# Altium PCB LED Dice.PcbDoc
Units mil, origin at the board's own origin, x right, y up, seen from the top; angles counter-clockwise.
Board outline 1950 x 950 mil, 4 copper layers (Layer 1, Layer 2, Layer 3, Layer 4), stack 22.373 mil thick; 66 components, 45 nets, 199 pads, 54 vias.
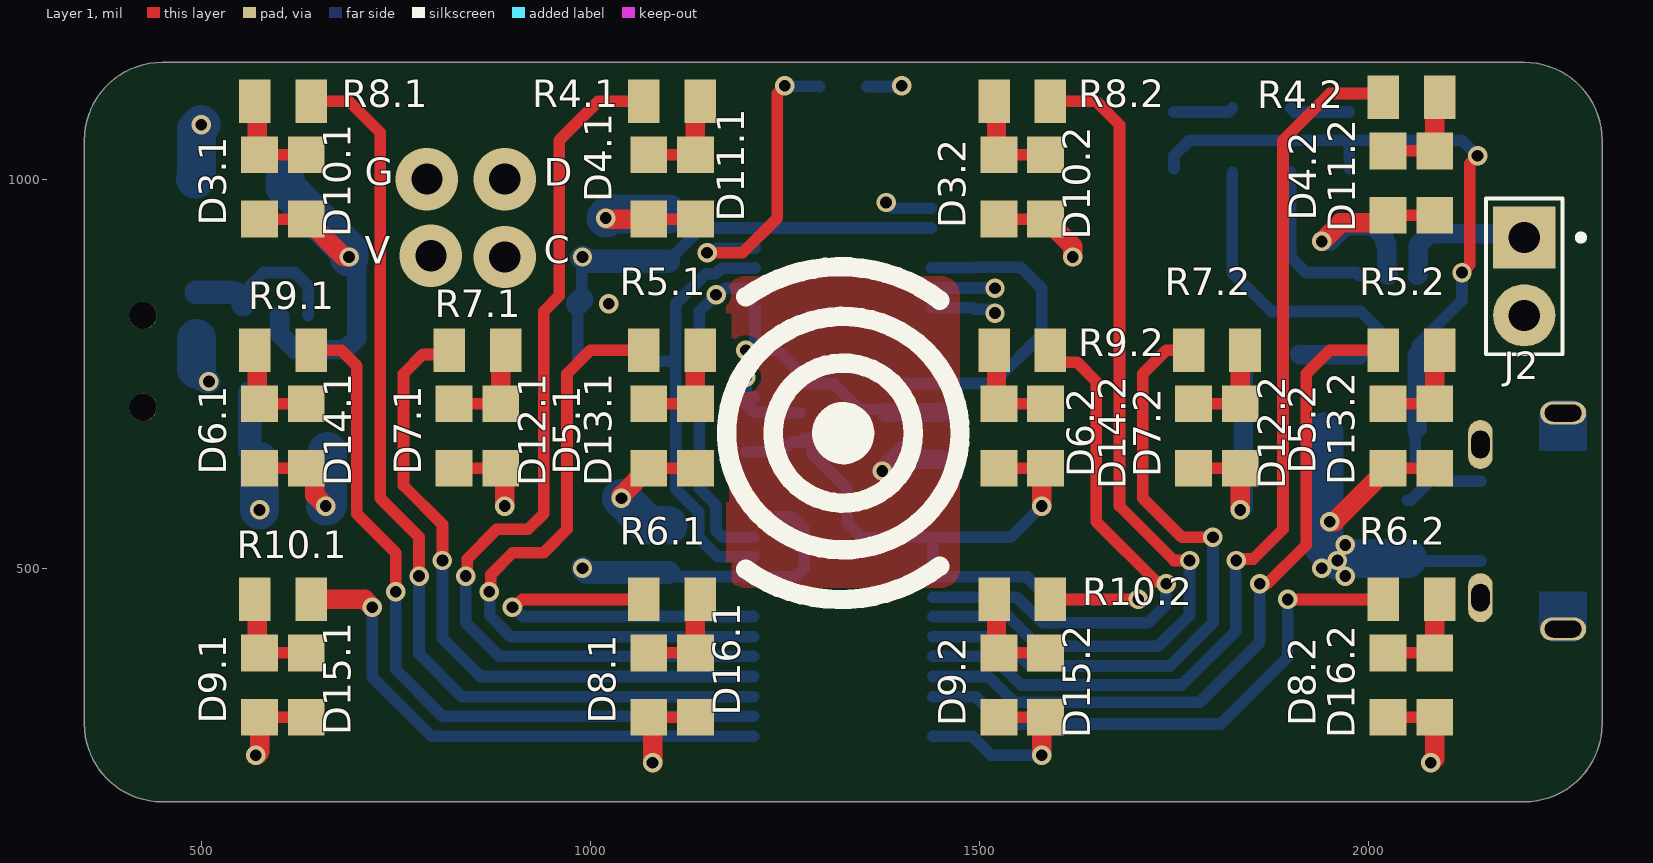
[diagram p0: Layer 1 view]
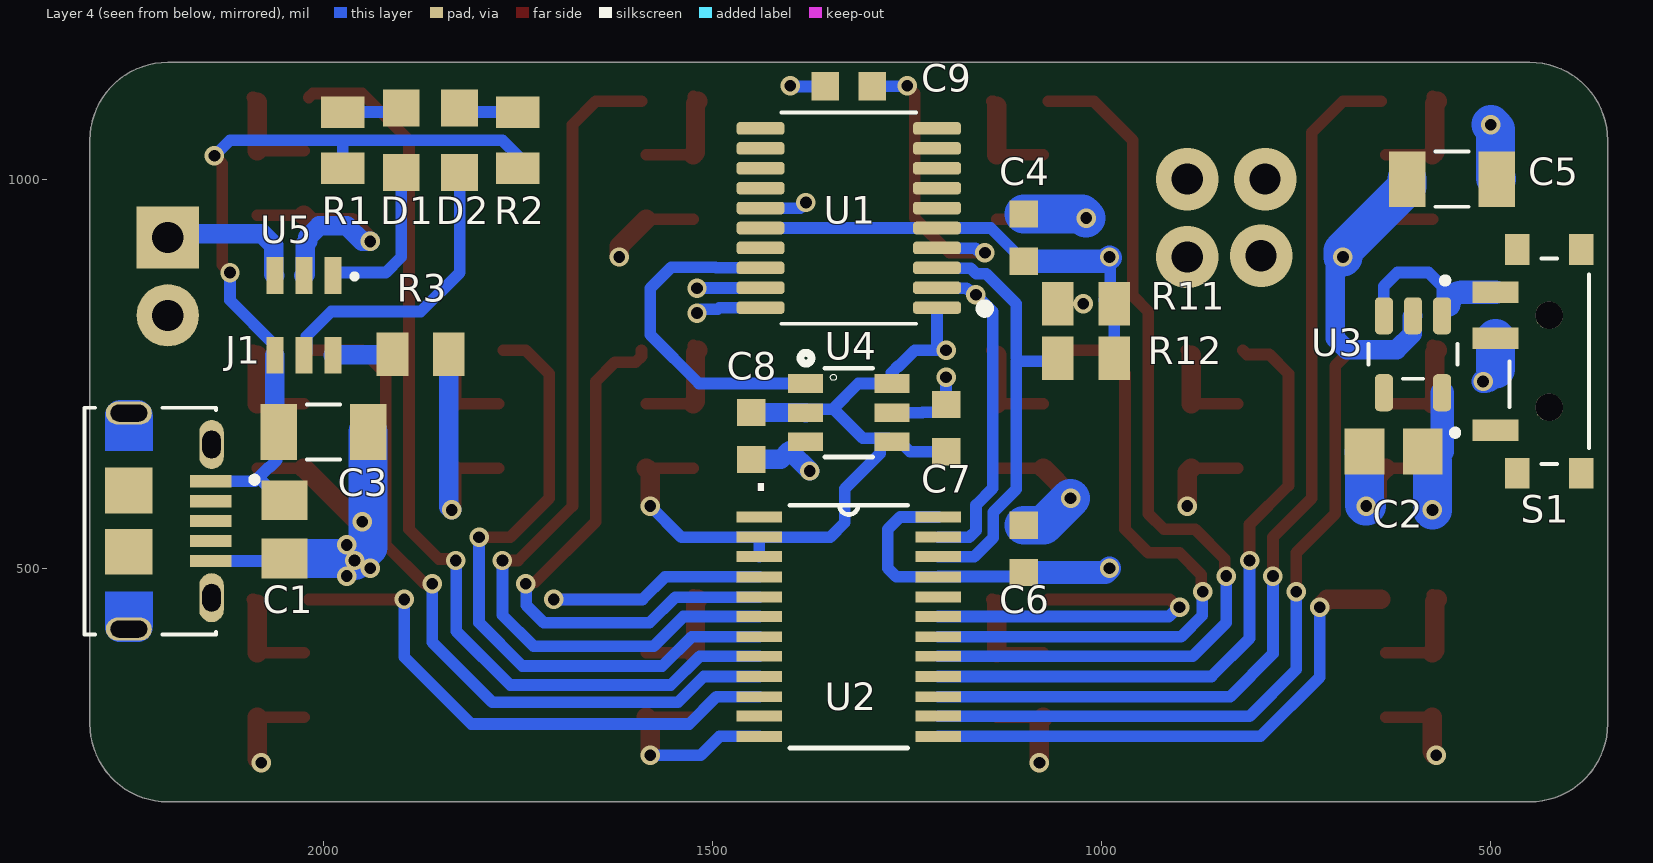
[diagram p1: Layer 4 view, seen from below]
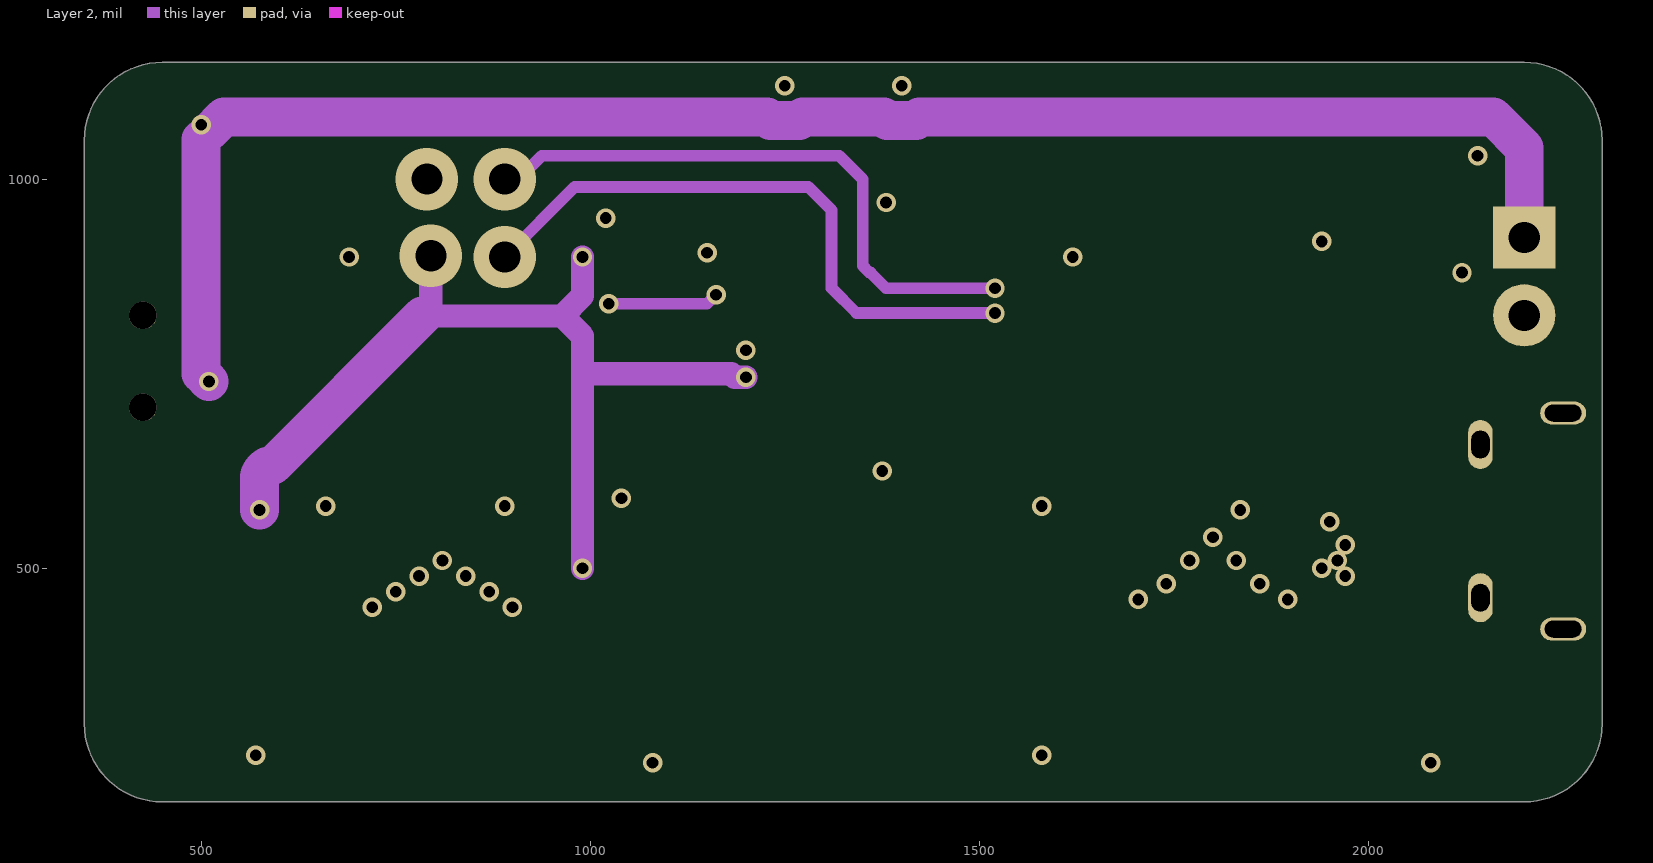
[diagram p2: Layer 2]
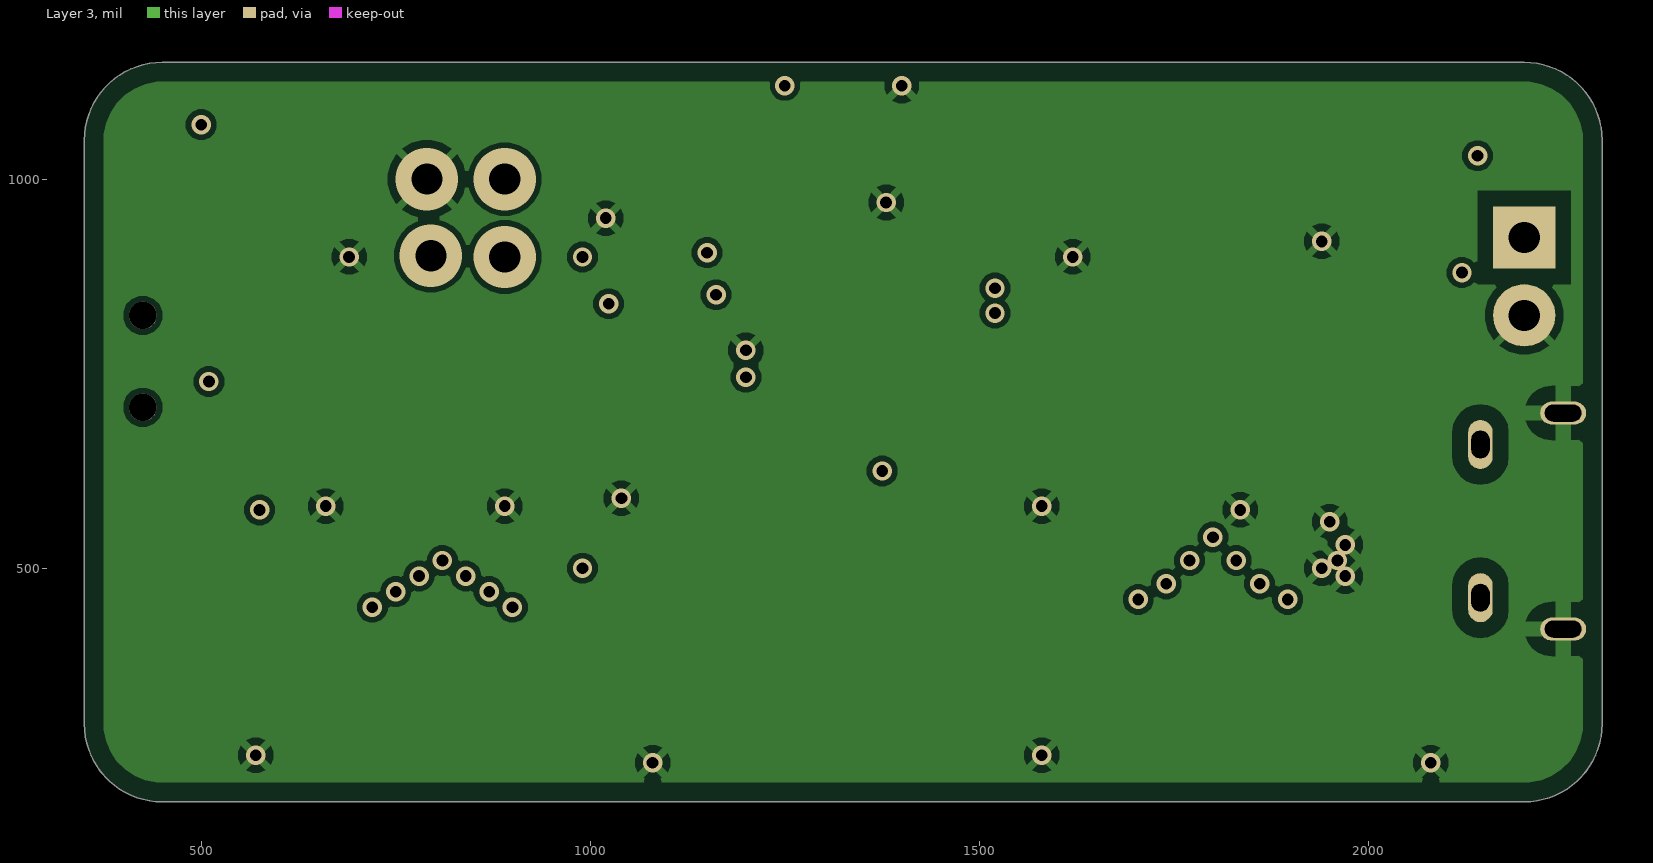
[diagram p3: Layer 3]
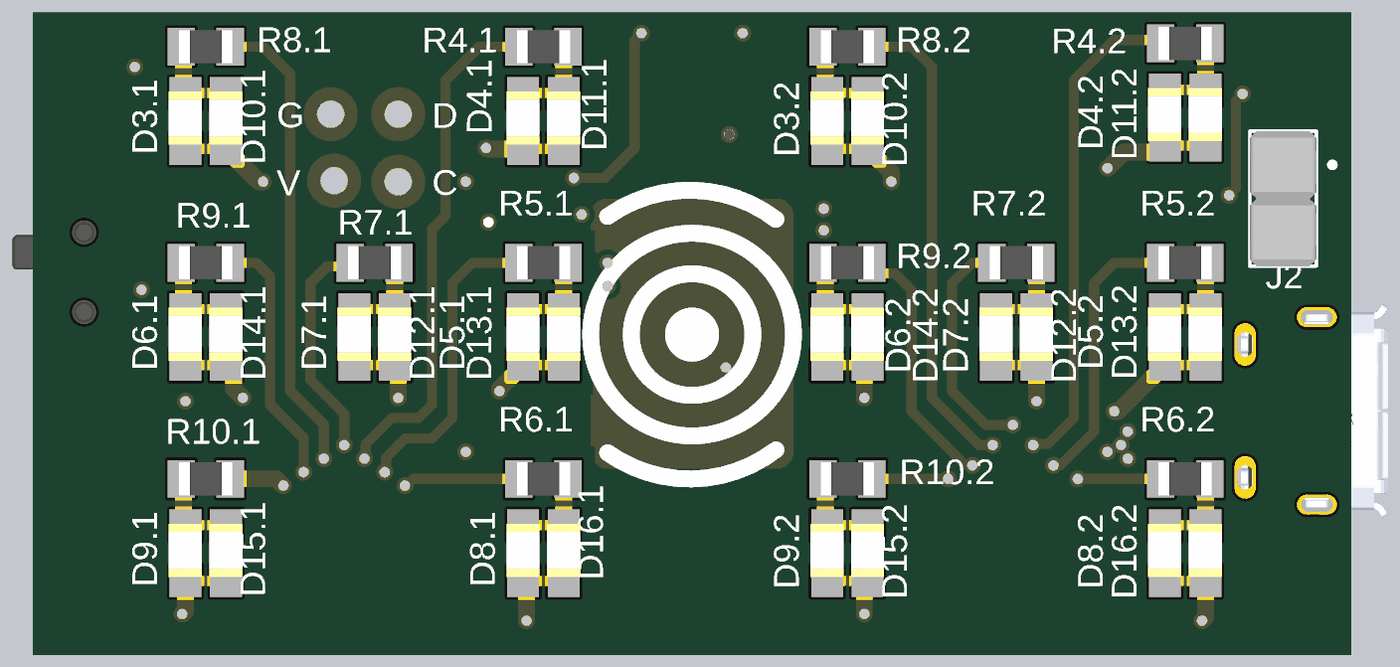
[diagram p4: 3D render of the assembled board from above, using the file's embedded part models]
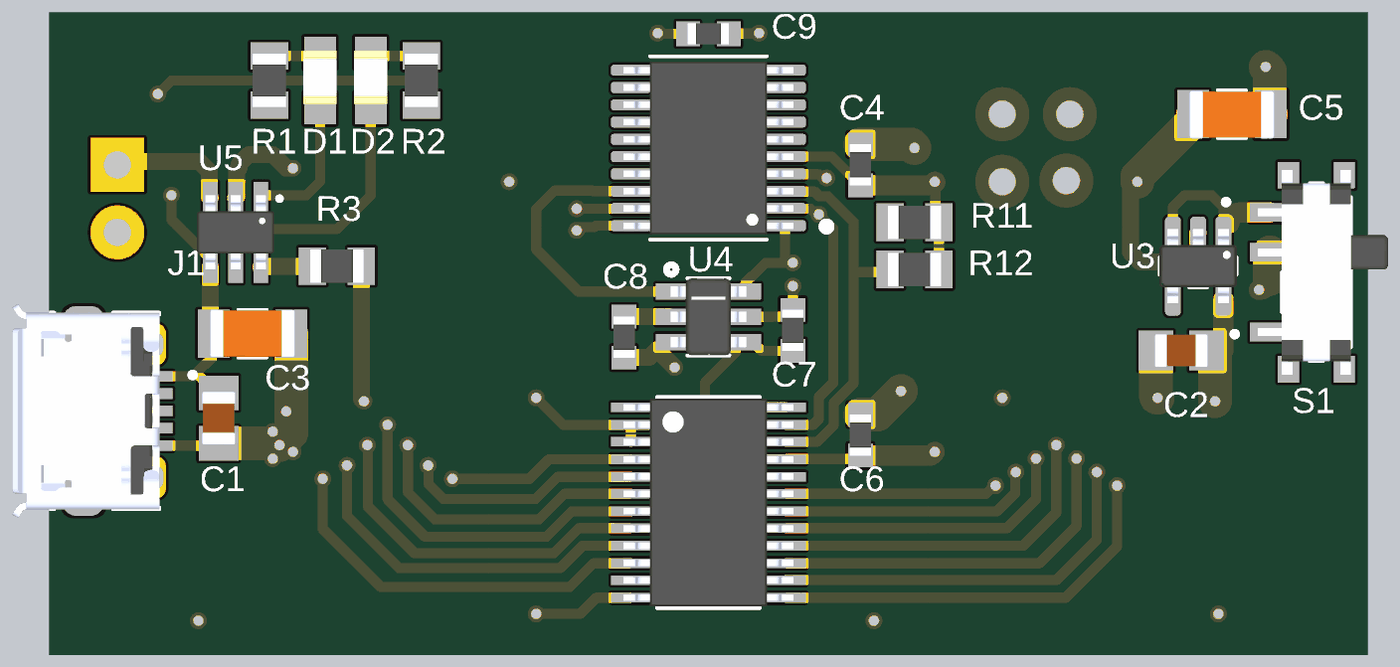
[diagram p5: 3D render of the assembled board from below, using the file's embedded part models]

## Layer stack, top to bottom
Top Solder: solder mask 0.4, Solder Resist, Dk 3.5
Layer 1: signal copper 1.378
Dielectric 2: prepreg 2.8, PP-006, Dk 4.1
Layer 2: signal copper 0.7087
Dielectric 1: dielectric 12.6, FR-4, Dk 4.8
Layer 3: signal copper 0.7087
Dielectric 3: prepreg 2.8, PP-006, Dk 4.1
Layer 4: signal copper 1.378
Bottom Solder: solder mask 0.4, Solder Resist, Dk 3.5

## Board outline
450,200 cw(c450,300) 350,300 350,1050 cw(c450,1050) 450,1150 2200,1150 cw(c2200,1050) 2300,1050 2300,300 cw(c2200,300) 2200,200

## Design rules (kind name [scope] priority, off if disabled: settings)
Clearance [All] p1: gap=7 ignorepadtopadclearanceinfootprint=FALSE except(20: SMDPad-Fill SMDPad-Poly SMDPad-Region THPad-Fill THPad-Poly THPad-Region)
PlaneClearance [All] p1: clearance=30
PolygonConnect [All] p1: connectstyle=Relief reliefconductorwidth=10 reliefentries=4 polygonreliefangle="45 Angle" airgapwidth=10
RoutingVias [All] p1: holewidth=15 width=25 viastyle="Through Hole" minholewidth=6 minwidth=10 maxholewidth=150 maxwidth=200
SolderMaskExpansion [All] p1: expansion=4 istentingtop=FALSE
Width [All] p1: maxlimit=300 minlimit=10 preferedwidth=25
29 further rules are at their usual default settings.

## Classes and differential pairs
channel class "LED Matrix": "LED Matrix1" "LED Matrix2"
component class "LED Matrix1": D3.2 D4.2 D5.2 D6.2 D7.2 D8.2 D9.2 D10.2 D11.2 D12.2 D13.2 D14.2 D15.2 D16.2 R4.2 R5.2 R6.2 R7.2 R8.2 R9.2 R10.2
component class "LED Matrix2": D3.1 D4.1 D5.1 D6.1 D7.1 D8.1 D9.1 D10.1 D11.1 D12.1 D13.1 D14.1 D15.1 D16.1 R4.1 R5.1 R6.1 R7.1 R8.1 R9.1 R10.1
component class "LED Dice": C1 C2 C3 C4 C5 C6 C7 C8 C9 D1 D2 J1 R1 R2 R3 R11 R12 S1 U1 U2 U3 U4 U5

## Components (designator, comment, footprint, x,y, rotation, side; value= is the part's Value field where it differs from the comment)
C1 "0805B105K500NT" CAPC2012X135N 2050,550 r270 bottom
C2 "0805B105K500NT" CAPC2012X135N 625,650 r0 bottom
C3 "CL31A106KPHNNNE" CAPC3216X180N 2000,675 r180 bottom
C4 "CL10B104KB8NNNC" CAPC1608X90N 1100,925 r270 bottom
C5 "CL31A106KPHNNNE" CAPC3216X180N 550,1000 r0 bottom
C6 "CL10B104KB8NNNC" CAPC1608X90N 1100,525 r270 bottom
C7 "CL10B104KB8NNNC" CAPC1608X90N 1200,680 r90 bottom
C8 "GRM0335C1E8R0CA01D" CAPC1608X90N 1450,670 r270 bottom
C9 "CL10B104KB8NNNC" CAPC1608X90N 1325,1119.09 r180 bottom
D1 "LTST-C171KRKT" DIOC200X125X110 1900,1050 r90 bottom
D2 "LTST-C171KRKT" DIOC200X125X110 1825,1050 r90 bottom
D3.1 "LTST-C171KRKT" DIOC200X125X110 575,990 r90 top (schematic designator D3)
D3.2 "LTST-C171KRKT" DIOC200X125X110 1525,990 r90 top (schematic designator D3)
D4.1 "LTST-C171KRKT" DIOC200X125X110 1075,990 r90 top (schematic designator D4)
D4.2 "LTST-C171KRKT" DIOC200X125X110 2025,995 r90 top (schematic designator D4)
D5.1 "LTST-C171KRKT" DIOC200X125X110 1075,670 r90 top (schematic designator D5)
D5.2 "LTST-C171KRKT" DIOC200X125X110 2025,670 r90 top (schematic designator D5)
D6.1 "LTST-C171KRKT" DIOC200X125X110 575,670 r90 top (schematic designator D6)
D6.2 "LTST-C171KRKT" DIOC200X125X110 1525,670 r90 top (schematic designator D6)
D7.1 "LTST-C171KRKT" DIOC200X125X110 825,670 r90 top (schematic designator D7)
D7.2 "LTST-C171KRKT" DIOC200X125X110 1775,670 r90 top (schematic designator D7)
D8.1 "LTST-C171KRKT" DIOC200X125X110 1075,350 r90 top (schematic designator D8)
D8.2 "LTST-C171KRKT" DIOC200X125X110 2025,350 r90 top (schematic designator D8)
D9.1 "LTST-C171KRKT" DIOC200X125X110 575,350 r90 top (schematic designator D9)
D9.2 "LTST-C171KRKT" DIOC200X125X110 1525,350 r90 top (schematic designator D9)
D10.1 "LTST-C171KRKT" DIOC200X125X110 635,990 r90 top (schematic designator D10)
D10.2 "LTST-C171KRKT" DIOC200X125X110 1585,990 r90 top (schematic designator D10)
D11.1 "LTST-C171KRKT" DIOC200X125X110 1135,990 r90 top (schematic designator D11)
D11.2 "LTST-C171KRKT" DIOC200X125X110 2085,995 r90 top (schematic designator D11)
D12.1 "LTST-C171KRKT" DIOC200X125X110 885,670 r90 top (schematic designator D12)
D12.2 "LTST-C171KRKT" DIOC200X125X110 1835,670 r90 top (schematic designator D12)
D13.1 "LTST-C171KRKT" DIOC200X125X110 1135,670 r90 top (schematic designator D13)
D13.2 "LTST-C171KRKT" DIOC200X125X110 2085,670 r90 top (schematic designator D13)
D14.1 "LTST-C171KRKT" DIOC200X125X110 635,670 r90 top (schematic designator D14)
D14.2 "LTST-C171KRKT" DIOC200X125X110 1585,670 r90 top (schematic designator D14)
D15.1 "LTST-C171KRKT" DIOC200X125X110 635,350 r90 top (schematic designator D15)
D15.2 "LTST-C171KRKT" DIOC200X125X110 1585,350 r90 top (schematic designator D15)
D16.1 "LTST-C171KRKT" DIOC200X125X110 1135,350 r90 top (schematic designator D16)
D16.2 "LTST-C171KRKT" DIOC200X125X110 2085,350 r90 top (schematic designator D16)
J1 "10118194-0001LF" AMPHENOL_10118194-0001LF 2250,560.63 r270 bottom
J2 "826646-2" TE_826646-2 2200,875 r270 top
R1 "0805W8F1001T5E" RESC2012X65N 1975,1050 r270 bottom
R2 "0805W8F1001T5E" RESC2012X65N 1750,1050 r270 bottom
R3 "0805W8F1002T5E" RESC2012X65N 1875,775 r0 bottom
R4.1 "0805W8F2200T5E" RESC2012X65N 1105,1100 r180 top (schematic designator R4)
R4.2 "0805W8F2200T5E" RESC2012X65N 2055,1105 r180 top (schematic designator R4)
R5.1 "0805W8F2200T5E" RESC2012X65N 1105,780 r180 top (schematic designator R5)
R5.2 "0805W8F2200T5E" RESC2012X65N 2055,780 r180 top (schematic designator R5)
R6.1 "0805W8F2200T5E" RESC2012X65N 1105,460 r180 top (schematic designator R6)
R6.2 "0805W8F2200T5E" RESC2012X65N 2055,460 r180 top (schematic designator R6)
R7.1 "0805W8F2200T5E" RESC2012X65N 855,780 r180 top (schematic designator R7)
R7.2 "0805W8F2200T5E" RESC2012X65N 1805,780 r180 top (schematic designator R7)
R8.1 "0805W8F2200T5E" RESC2012X65N 605,1100 r0 top (schematic designator R8)
R8.2 "0805W8F2200T5E" RESC2012X65N 1555,1100 r0 top (schematic designator R8)
R9.1 "0805W8F2200T5E" RESC2012X65N 605,780 r0 top (schematic designator R9)
R9.2 "0805W8F2200T5E" RESC2012X65N 1555,780 r0 top (schematic designator R9)
R10.1 "0805W8F2200T5E" RESC2012X65N 605,460 r0 top (schematic designator R10)
R10.2 "0805W8F2200T5E" RESC2012X65N 1555,460 r0 top (schematic designator R10)
R11 "0805W8F1002T5E" RESC2012X65N 1020,840 r180 bottom
R12 "0805W8F1002T5E" RESC2012X65N 1020,770 r180 bottom
S1 "EG1215AA" SW_EG1215AA 425,765.94 r90 bottom
U1 "STM32F070F6P6" SOP65P640X120-20N 1325,950 r0 bottom
U2 "PCA9535PW,112" SOP65P640X110-24N 1325,425 r180 bottom
U3 "TLV74330PDBVR" SOT95P280X145-5N 600,775 r270 bottom
U4 "TTP223-BA6" SOT23-6#1 1325,700 r270 bottom
U5 "TP4057" SOT23-6#2 2025,825 r0 bottom

## Footprints (in the part's own frame and the unit in brackets; to place one, negate y for a bottom-side part, rotate by r counter-clockwise, add the part's x,y. Pads: shape width x height; smd on the part's side, far side on the other; paste and mask are expansions set on the pad)
AMPHENOL_10118194-0001LF [mm]
  rect 0.4x1.35 smd: 1(-1.3,2.675) 2(-0.65,2.675) 3(0,2.675) 4(0.65,2.675) 5(1.3,2.675)
  oval 1.6x0.8 hole 0.6 slot 0.9 at 0 deg: S1(-2.5,2.7) S2(2.5,2.7)
  oval 0.75x1.5 hole 0.55 slot 1.2 at 90 deg: S3(-3.525,0) S6(3.525,0)
  rect 1.5x1.55 smd: S4(-1,0) S5(1,0)
  Layer 1 region: -2.3,-0.775 -3.445,-0.775 -3.471,-0.774 -3.497,-0.772 -3.523,-0.769 -3.549,-0.764 -3.574,-0.758 -3.6,-0.751 -3.624,-0.742 -3.648,-0.732 -3.672,-0.721 -3.695,-0.708 -3.717,-0.694 -3.739,-0.68 -3.76,-0.664 -3.78,-0.647 -3.799,-0.629 -3.817,-0.61 -3.834,-0.59 -3.85,-0.569 -3.864,-0.547 -3.878,-0.525 -3.891,-0.502 -3.902,-0.478 -3.912,-0.454 -3.921,-0.43 -3.928,-0.404 -3.934,-0.379 -3.939,-0.353 -3.942,-0.327 -3.944,-0.301 -3.945,-0.275 -3.945,0.275 -3.944,0.301 -3.942,0.327 -3.939,0.353 -3.934,0.379 -3.928,0.404 -3.921,0.43 -3.912,0.454 -3.902,0.478 -3.891,0.502 -3.878,0.525 -3.864,0.547 -3.85,0.569 -3.834,0.59 -3.817,0.61 -3.799,0.629 -3.78,0.647 -3.76,0.664 -3.739,0.68 -3.717,0.694 -3.695,0.708 -3.672,0.721 -3.648,0.732 -3.624,0.742 -3.6,0.751 -3.574,0.758 -3.549,0.764 -3.523,0.769 -3.497,0.772 -3.471,0.774 -3.445,0.775 -2.3,0.775
  Layer 1 region: 3.471,0.774 3.497,0.772 3.523,0.769 3.549,0.764 3.574,0.758 3.6,0.751 3.624,0.742 3.648,0.732 3.672,0.721 3.695,0.708 3.717,0.694 3.739,0.68 3.76,0.664 3.78,0.647 3.799,0.629 3.817,0.61 3.834,0.59 3.85,0.569 3.864,0.547 3.878,0.525 3.891,0.502 3.902,0.478 3.912,0.454 3.921,0.43 3.928,0.404 3.934,0.379 3.939,0.353 3.942,0.327 3.944,0.301 3.945,0.275 3.945,-0.275 3.944,-0.301 3.942,-0.327 3.939,-0.353 3.934,-0.379 3.928,-0.404 3.921,-0.43 3.912,-0.454 3.902,-0.478 3.891,-0.502 3.878,-0.525 3.864,-0.547 3.85,-0.569 3.834,-0.59 3.817,-0.61 3.799,-0.629 3.78,-0.647 3.76,-0.664 3.739,-0.68 3.717,-0.694 3.695,-0.708 3.672,-0.721 3.648,-0.732 3.624,-0.742 3.6,-0.751 3.574,-0.758 3.549,-0.764 3.523,-0.769 3.497,-0.772 3.471,-0.774 3.445,-0.775 2.3,-0.775 2.3,0.775 3.445,0.775
  silkscreen extent -3.7,-1.45 3.7,4.2, body extent -4.02,-2.68 4.02,2.85, height 2.67
CAPC1608X90N [mm]
  rect 0.89x0.93 smd: 1(-0.77,0) 2(0.77,0)
  body extent -0.77,-0.4 0.77,0.4, height 0.6
CAPC2012X135N [mm]
  rect 1.3x1.5 smd: 1(-0.95,0) 2(0.95,0)
  body extent -1,-0.63 1,0.63, height 1.44
CAPC3216X180N [mm]
  rect 1.2x1.82 smd: 1(-1.46,0) 2(1.46,0)
  silkscreen extent -0.54,-0.9 0.54,0.9, body extent -1.6,-0.89 1.6,0.91, height 1.56
DIOC200X125X110 [mm]
  rect 1.2x1.2 smd: NEG(-1.05,0) POS(1.05,0)
  body extent -0.89,-0.62 1.11,0.63, height 1.1
RESC2012X65N [mm]
  rect 1.03x1.42 smd: 1(-0.92,0) 2(0.92,0)
  body extent -1,-0.63 1,0.63, height 0.65
SOP65P640X110-24N [mil]
  rect 58x14 smd: 1(-115,141) 2(-115,115) 3(-115,90) 4(-115,64) 5(-115,38) 6(-115,13) 7(-115,-13) 8(-115,-38) 9(-115,-64) 10(-115,-90) 11(-115,-115) 12(-115,-141) 13(115,-141) 14(115,-115) 15(115,-90) 16(115,-64) 17(115,-38) 18(115,-13) 19(115,13) 20(115,38) 21(115,64) 22(115,90) 23(115,115) 24(115,141)
  silkscreen extent -76,-156 76,156, body extent -126,-154 126,154, height 43
SOP65P640X120-20N [mm]
  rrect50% 1.56x0.41 smd: 1(-2.88,2.925) 2(-2.88,2.275) 3(-2.88,1.625) 4(-2.88,0.975) 5(-2.88,0.325) 6(-2.88,-0.325) 7(-2.88,-0.975) 8(-2.88,-1.625) 9(-2.88,-2.275) 10(-2.88,-2.925) 11(2.88,-2.925) 12(2.88,-2.275) 13(2.88,-1.625) 14(2.88,-0.975) 15(2.88,-0.325) 16(2.88,0.325) 17(2.88,0.975) 18(2.88,1.625) 19(2.88,2.275) 20(2.88,2.925)
  silkscreen extent -4.59,-3.45 2.2,3.45, body extent -3.2,-3.25 3.2,3.25, height 1.2
SOT23-6#1 [mil]
  rect 24x45 smd: 1(-37.4,-55.28) 2(0,-55.28) 3(37.4,-55.28) 4(37.4,55.28) 5(0,55.28) 6(-37.4,55.28)
  silkscreen extent -77,-62 57,31, body extent -57,-56 57,56, height 50
SOT23-6#2 [mil]
  rect 21.65x47.24 smd: 1(-37.4,-51.18) 2(0,-51.18) 3(37.4,-51.18) 4(37.4,51.18) 5(0,51.18) 6(-37.4,51.18)
  silkscreen extent -66,-51 -64,-49, body extent -57,-55 57,55, height 57
SOT95P280X145-5N [mm]
  rrect50% 1.21x0.59 smd: 1(-1.255,0.95) 2(-1.255,0) 3(-1.255,-0.95) 4(1.255,-0.95) 5(1.255,0.95)
  silkscreen extent -2.51,-1.45 0.8,1.45, body extent -1.4,-1.45 1.4,1.45, height 1.45
SW_EG1215AA [mm]
  rect 0.7x1.5 smd: 1(-2.25,1.75) 2(0.75,1.75) 3(2.25,1.75)
  rect 1x0.8 smd: S1(-3.65,1.05) S2(-3.65,-1.05) S3(3.65,-1.05) S4(3.65,1.05)
  round 0.9 hole 0.9 unplated: ""(-1.5,0) ""(1.5,0)
  silkscreen extent -3.35,-1.3 3.35,3.17, body extent -3.85,-2.7 3.85,2.2, height 1.4
TE_826646-2 [mil]
  rect 80x80 hole 40: 1(-50,0)
  round 80 hole 40: 2(50,0)
  silkscreen extent -100,-49 100,77, body extent -100,-49 100,49, height 343

## Part data
C1 C2: "50V 1uF X7R ±10% 0805 Multilayer Ceramic Capacitors MLCC - SMD/SMT ROHS"
C3 C5: "Cap Ceramic 10uF 10VDC X5R 10% SMD 1206 Embossed T/R", Package=None, Availability=Unavailable, MP=CL31A106KPHNNNE, Price=None
C4 C6 C7 C9: "0.1ÂµF Â±10% 50V Ceramic Capacitor X7R 0603 _1608 Metric_", Package="0603 Samsung", Availability=Unavailable, MF="Samsung Electro-Mechanics", MP=CL10B104KB8NNNC, Price=None, SnapEDA_Link=https://www.snapeda.com/parts/CL10B104KB8NNNC/Samsung%20Electro-Mechanics/view-part/3598309/?ref=snap
C8: "SMD Capacitor C0G(EIA) with Capacitance: 8.0pF Tol. 0.25pF. Rated Voltage: 25Vdc", Package=None, Availability=Unavailable, MP=GRM0335C1E8R0CA01D, Price=None
D1 D2 D3.1 D3.2 D4.1 D4.2 D5.1 D5.2 D6.1 D6.2 D7.1 D7.2 D8.1 D8.2 D9.1 D9.2 D10.1 D10.2 D11.1 D11.2 D12.1 D12.2 D13.1 D13.2 D14.1 D14.2 D15.1 D15.2 D16.1 D16.2: "Red LED  0805 _2012 Indication 631nm - Discrete 2V 0805 _2012 Metric_", Package="0805 Lite-On", Availability=Unavailable, MF="Lite-On Inc.", MP=LTST-C171KRKT, Price=None, SnapEDA_Link=https://www.snapeda.com/parts/LTST-C171KRKT/Lite-On%20Inc./view-part/357775/?ref=snap
J1: "Micro USB, Input Output Connectors, B TYPE RECEPTACLE with flange", Package=None, Availability="In Stock", Check_prices=https://www.snapeda.com/parts/10118194-0001LF/Amphenol+FCI/view-part/?ref=eda, MF="Amphenol ICC", MP=10118194-0001LF, Price=None, Purchase-URL=https://pricing.snapeda.com/search/part/10118194-0001LF/?ref=eda, SnapEDA_Link=https://www.snapeda.com/parts/10118194-0001LF/Amphenol+FCI/view-part/?ref=snap
J2: "Conn Unshrouded Header HDR 2 POS 2.54mm Solder ST Thru-Hole", Package=None, Availability=Good, Centerline_Pitch="2.54 mm[.1 in]", DigiKey-Purchase-URL=https://snapeda.com/shop?store=DigiKey&id=470405, EU_RoHS_Compliance=Compliant, MF="TE Connectivity", Mouser-Purchase-URL=https://snapeda.com/shop?store=Mouser&id=470405, MP=826646-2, Number_of_Positions=2, Price=None, Product_Type=Connector, SnapEDA_Link=https://www.snapeda.com/parts/826646-2/TE%20Connectivity%20AMP%20Connectors/view-part/470405/?ref=snap
R1 R2: "125mW Thick Film Resistors 150V ±100ppm/℃ ±1% 1kΩ 0805 Chip Resistor - Surface Mount ROHS", Supplier Part Number 1=303-0805W8F1001T5E, Supplier 1=Mouser
R3 R11 R12: "125mW Thick Film Resistors 150V ±100ppm/℃ ±1% 10kΩ 0805 Chip Resistor - Surface Mount ROHS"
R4.1 R4.2 R5.1 R5.2 R6.1 R6.2 R7.1 R7.2 R8.1 R8.2 R9.1 R9.2 R10.1 R10.2: "220Ω 0805 125mW Thick Film Resistors 150V ±100ppm/℃ ±1%  Chip Resistor - Surface Mount ROHS"
S1: "Slide Switch SPDT Surface Mount, Right Angle", Package=None, Check_prices=https://www.snapeda.com/parts/EG1215AA/E-Switch/view-part/?ref=eda, MF=E-Switch, MP=EG1215AA, Purchase-URL=https://pricing.snapeda.com/search/part/EG1215AA/?ref=eda, SnapEDA_Link=https://www.snapeda.com/parts/EG1215AA/E-Switch/view-part/?ref=snap
U1: "ARMÂ® CortexÂ®-M0 STM32F0 Microcontroller IC 32-Bit Single-Core 48MHz 32KB (32K x 8) FLASH 20-TSSOP", Package="TSSOP-20 STMicroelectronics", Check_prices=https://www.snapeda.com/parts/STM32F070F6P6/STMicroelectronics/view-part/?ref=eda, MF=STMicroelectronics, MP=STM32F070F6P6, SnapEDA_Link=https://www.snapeda.com/parts/STM32F070F6P6/STMicroelectronics/view-part/?ref=snap
U2: "16-bit I2C-bus and SMBus, low power I/O port with interrupt", Package=None, Availability=Unavailable, MP=PCA9535PW,112, Price=None
U3: "300-mA low-IQ low-dropout (LDO) voltage regulator with enable 5-SOT-23 -40 to 125", Package="SOT-23-5 Texas Instruments", Availability=Warning, Check_prices=https://www.snapeda.com/parts/TLV74330PDBVR/Texas%20Instruments/view-part/2878367/?ref=eda, MF="Texas Instruments", MP=TLV74330PDBVR, Price=None, Purchase-URL=https://pricing.snapeda.com/search/part/TLV74330PDBVR/?ref=eda, SnapEDA_Link=https://www.snapeda.com/parts/TLV74330PDBVR/Texas%20Instruments/view-part/2878367/?ref=snap
U4: "<b>DÃ©tecteur</b> de Touches Tactiles IC<p> Doc constructeur <a href=\"http://geii/magasin/pdf/TTP223-BA6.pdf\" title=\"Enlarge picture\"> <img src=\"http://geii/magasin/images/pdf.jpg\"></a><p> <b>GEII/IUT ANGERS</b>", Package=None, Availability="Not in stock", Check_prices=https://www.snapeda.com/parts/TTP223-BA6/TONTEK/view-part/?ref=eda, MF=tontek, MP=TTP223-BA6, Price=None, SnapEDA_Link=https://www.snapeda.com/parts/TTP223-BA6/TONTEK/view-part/?ref=snap
U5: "<b>500mA linear li-ion battery charger</b><p> tp4057 actual charge current to 500ma, dual-lamp indication, reverse battery protection.<br> Alternative to MAX1551 or MAX1555 (not compatible!)<p> Datasheet from TP micro: <br> http://www.tpmicro.com/datasheet/TP4057Ver1.0_preview.pdf <br> http://www.tp-asic.com/te_product_a/2009-05-20/33.chtml", Package=None, Availability="Not in stock", Check_prices=https://www.snapeda.com/parts/TP4057/Top+Power/view-part/?ref=eda, MF=toppower, MP=TP4057, Price=None, SnapEDA_Link=https://www.snapeda.com/parts/TP4057/Top+Power/view-part/?ref=snap

## Via types
v1: diameter 25, hole 15, Layer 1 to Layer 4, tented both sides, 50 vias
v2: diameter 80, hole 40, Layer 1 to Layer 4, 4 vias

## Nets (pads, with @x,y where several pads share a name; then routed paths per layer and width w, separated by ;. In a path a pad name is that pad's centre, name@x,y a point inside that pad or via, vN(x,y) a via of type N, cw(c..) or ccw(c..) an arc to the next point about the centre after c; other vN are vias at no path point)
+3.3V: C2.1 C4.2 C6.2 C7.2 R11.2 R12.2 U1.5 U1.16 U2.21 U2.24 U3.5 U4.5 | length 2489.3
  Layer 2 w30: 784.26,824.26 800,824.26 964.26,824.26 ; 795.11,829.15 v2(795.11,901.66) ; v1(990,500) 990,750 ; v1(990,900) 990,850 964.26,824.26 ; v1(1200,745.5) 1185.71,745.5 1181.21,750 990,750 ; 964.26,824.26 990,798.52 990,750
  Layer 2 w50: v1(575,575) 575,615 cw(c592.5,615) 592.5,632.5 784.26,824.26
  Layer 4 w15: R12.2 R11.2 ; R11.2@989.06,845.28 v1@989.06,899.06 ; C6.2 1105.18,489.5 1209.5,489.5 U2.21 1264,489 1275,500 1275,550 1259,566 U2.24 ; C4.2 1100.79,894.68 1110.81,904.7 1110.81,905.49 1142.52,937.2 U1.5 U1.16 ; v1(1200,745.5) C7.2 1210.02,700.3 1230.02,700.3 1230.32,700 U4.5 ; C7.2@1210.81,719.51 C7.2@1210.81,720.3
  Layer 4 w30: C2.1@562.6,650 U3.5 ; R11.2 R11.2@989.06,845.28 ; v1@989.06,899.06 v1(990,900) 995.32,894.68 C4.2 ; v1(990,500) 995.32,494.69 C6.2
  Layer 4 w50: v1(575,575) C2.1@575,637.4
+5: C1.1 C3.1 J1.1 R1.2 R2.2 U5.4 | length 1019.8
  Layer 1 w15: v1(2120,880) 2130,890 2130,1020 v1(2140,1030)
  Layer 4 w15: R2.2 1750,1030 1770,1050 1975,1050 ; R1.2 1975,1050 ; C1.1 2053.94,587.4 C1.1@2078.35,611.81 ; C3.1@2062.4,679.92 C3.1 2060,672.48 2060,638.79 2068.79,630 2070,630 2088.19,611.81 J1.1 ; U5.4 2062.4,786.61 2120,844.21 v1(2120,880) ; v1(2140,1030) 2120,1050 1975,1050
  Layer 4 w25: C3.1@2062.4,679.92 U5.4
Batt+: C5.1 J2.1 S1.2 U5.3 | length 2474.1
  Layer 2 w50: 500,1050.71 500,750 v1(510,740) ; 509.64,1060.36 529.29,1080 1227.07,1080 1231.57,1075.5 1268.43,1075.5 1272.93,1080 1377.07,1080 1381.57,1075.5 1418.43,1075.5 1422.93,1080 2160,1080 2200,1040 J2.1
  Layer 4 w25: U5.3 2064.07,877.86 2064.07,915.36 2078.72,930 2195,930 J2.1
  Layer 4 w30: 493.9,756.1 ccw(c510,756.1) v1(510,740)
  Layer 4 w50: C5.1 493.9,1001.38 493.9,1063.9 v1(500,1070) ; 493.9,756.1 S1.2
GND: C1.2 C2.2 C3.2 C4.1 C5.2 C6.1 C7.1 C8.1 C9.1 D3.1.NEG D3.2.NEG D4.1.NEG D4.2.NEG D5.1.NEG D5.2.NEG D6.1.NEG D6.2.NEG D7.1.NEG D7.2.NEG D8.1.NEG D8.2.NEG D9.1.NEG D9.2.NEG D10.1.NEG D10.2.NEG D11.1.NEG D11.2.NEG D12.1.NEG D12.2.NEG D13.1.NEG D13.2.NEG D14.1.NEG D14.2.NEG D15.1.NEG D15.2.NEG D16.1.NEG D16.2.NEG J1.5 J1.S3 J1.S6 J2.2 R3.1 U1.1 U1.15 U2.2 U2.3 U2.12 U3.2 U4.2 U4.4 U4.6 U5.2 | length 4239.2
  Layer 1 w15: D9.1.NEG D15.1.NEG ; D6.1.NEG D14.1.NEG ; D3.1.NEG D10.1.NEG ; D7.1.NEG D12.1.NEG ; D8.1.NEG D16.1.NEG ; D5.1.NEG D13.1.NEG ; D4.1.NEG D11.1.NEG ; D9.2.NEG D15.2.NEG ; D6.2.NEG D14.2.NEG ; D3.2.NEG D10.2.NEG ; D7.2.NEG D12.2.NEG ; D8.2.NEG D16.2.NEG ; D5.2.NEG D13.2.NEG ; D4.2.NEG D11.2.NEG
  Layer 1 w25: v1(570,260) ccw(c570,265) 575,265 D9.1.NEG ; D14.1.NEG 646.12,617.54 646.12,593.88 v1(660,580) ; D10.1.NEG 683.66,900 v1(690,900) ; D12.1.NEG 890,623.66 v1(890,580) ; v1(1020,950) 1021.34,948.66 D4.1.NEG ; v1(1040,590) 1040,593.66 D5.1.NEG ; D8.1.NEG 1080,303.66 v1(1080,250) ; v1(1580,260) 1580,303.66 D15.2.NEG ; v1(1580,580) 1580,623.66 D14.2.NEG ; D10.2.NEG 1620,913.66 v1(1620,900) ; v1(1835,575) D12.2.NEG ; v1(1940,920) 1963.88,943.88 2015.22,943.88 D4.2.NEG ; v1(1950,560) 1956.34,560 D5.2.NEG ; v1(2080,250) 2085,255 D16.2.NEG
  Layer 4 w15: C7.1 1246.31,649.68 1259.22,662.6 U4.4 ; v1(1200,780) 1240,780 1260,760 1261.21,760 1270,751.21 1270,737.68 U4.6 1312.6,737.4 1345.5,704.5 ; 1211.61,788.39 U1.1 ; C9.1 1399.09,1119.09 v1(1400,1120) ; v1(1380,970) 1387.2,962.8 U1.15 ; U4.2 1375.78,704.5 1345.5,704.5 ; U2.12 1491,284 1515,260 v1(1580,260) ; U2.3 U2.2 ; v1(1580,580) 1540,540 U2.2 ; C1.2 2053.15,509.45 J1.5 ; U4.4 1280.22,662.6 1284.72,658.1 1284.72,647.6 1330,602.32 1330,558.79 1348.79,540 U2.2 ; U4.4 1274.22,667.1 1307.1,667.1 1344.5,704.5 1345.5,704.5
  Layer 4 w25: U3.2 600.89,823.52 600.89,801.32 621.11,781.09 685.36,781.09 700,795.74 700,890 v1(690,900) ; U4.2 1380.43,700.16 1449.84,700.16 C8.1 ; v1(1835,575) 1838.78,578.78 R3.1 ; v1(1940,920) 1950,920 1970,940 2005.36,940 2020,925.36 2020,920 2023.33,916.67 2023.33,877.86 U5.2
  Layer 4 w50: C5.2 607.48,990.55 690,908.03 v1(690,900) ; v1(660,580) ccw(c660,582.4) 662.4,582.4 C2.2 C2.2@662.99,649.41 ; v1(1020,950) 1025.32,955.32 C4.1 ; v1(1040,590) 1074.68,555.32 C6.1 ; C3.2 1942.52,527.48 v1(1960,510) 1962.6,512.6 C1.2
  other v1: 1970,490 1940,500 1970,530
  other v2: 790,1000
led11: R8.1.2 U2.15 | length 1248.8
  Layer 1 w15: R8.1.2 690,1100 730,1060 730,590 780,540 v1(780,490)
  Layer 4 w15: v1(780,490) 780,390 835,335 U2.15
led12: R9.1.2 U2.14 | length 964.4
  Layer 1 w15: R9.1.2@640,778.78 R9.1.2 680,780 700,760 700,570 750,520 v1(750,470)
  Layer 4 w15: v1(750,470) 750,370 810,310 U2.14
led13: R10.1.2 U2.13 | length 696.1
  Layer 1 w15: R10.1.2@640,458.78 R10.1.2
  Layer 1 w25: R10.1.2 710,460 v1(720,450)
  Layer 4 w15: v1(720,450) 720,360 796,284 U2.13
led14: R7.1.2 U2.16 | length 852.2
  Layer 1 w15: v1(810,510) 810,556.35 760,606.35 760,750 784.79,774.79 813.57,774.79 R7.1.2
  Layer 4 w15: v1(810,510) 810,410 859,361 U2.16
led15: R4.1.2 U2.17 | length 1210.4
  Layer 1 w15: v1(840,490) 841.91,491.91 841.91,511.91 880,550 920,550 940,570 940,830 960,850 960,1050 1010,1100 R4.1.2
  Layer 4 w15: v1(840,490) 840,430 883,387 U2.17
led16: R5.1.2 U2.18 | length 837.7
  Layer 1 w15: v1(870,470) 871.91,471.91 871.91,491.91 900,520 940,520 970,550 970,750 1000,780 R5.1.2
  Layer 4 w15: v1(870,470) 870.66,469.34 870.66,439.34 898,412 U2.18
led17: R6.1.2 U2.19 | length 487.9
  Layer 1 w15: v1(900,450) 902.71,450 912.71,460 R6.1.2
  Layer 4 w15: v1(900,450) 901.79,450 913.79,438 U2.19
led21: R6.2.2 U2.10 | length 702.9
  Layer 1 w15: v1(1896,460) R6.2.2
  Layer 4 w15: U2.10 1495,335 1530,300 1810,300 1896,386 v1(1896,460)
led22: R5.2.2 U2.9 | length 952.5
  Layer 1 w15: v1(1860,480) 1870,480 1920,530 1920,750 1950,780 R5.2.2
  Layer 4 w15: U2.9 1511.43,361 1544.43,328 1783,328 1860,405 v1(1860,480)
led23: R4.2.2 U2.8 | length 1256.6
  Layer 1 w15: v1(1830,510) 1831.91,511.91 1851.91,511.91 1890,550 1890,1050 1950,1110 2013.78,1110 R4.2.2
  Layer 4 w15: U2.8 1516.54,387 1553.54,350 1760,350 1829.13,419.13 1829.13,509.13 v1(1830,510)
led24: R7.2.2 U2.7 | length 850.5
  Layer 1 w15: R7.2.2 1740,780 1710,750 1710,590 1760,540 v1(1800,540)
  Layer 4 w15: U2.7 1526.89,412 1564.45,374.45 1744.45,374.45 1800,430 v1(1800,540)
led25: R10.2.2 U2.4 | length 388.8
  Layer 1 w15: R10.2.2 v1(1704,460)
  Layer 4 w15: U2.4 1561,489 1590,460 v1(1704,460)
led26: R9.2.2 U2.5 | length 733
  Layer 1 w15: R9.2.2 1591.22,772.32 1599,764.55 1625.45,764.55 1650,740 1650,560 1728.09,481.91 1738.09,481.91 v1(1740,480)
  Layer 4 w15: U2.5 1548.02,463 1581.02,430 1716.77,430 1739.27,452.5 1739.27,479.27 v1(1740,480)
led27: R8.2.2 U2.6 | length 1142.5
  Layer 1 w15: R8.2.2 1650,1100 1680,1070 1680,580 1750,510 v1(1770,510)
  Layer 4 w15: U2.6 1537.66,438 1575.66,400 1730,400 1770,440 v1(1770,510)
NetD1_NEG: D1.NEG U5.1 | length 206.4
  Layer 4 w15: D1.NEG 1900,900 1920,880 1984.27,880 1987.6,876.67 U5.1
NetD1_POS: D1.POS R1.1 | length 77.1
  Layer 4 w15: D1.POS 1905.12,1086.22 R1.1
NetD2_NEG: D2.NEG U5.5 | length 385.1
  Layer 4 w15: D2.NEG 1825,880 1875,830 1990,830 2021.67,798.33 2021.67,777.14 U5.5
NetD2_POS: D2.POS R2.1 | length 77.1
  Layer 4 w15: R2.1 1819.88,1086.22 D2.POS
NetD3.1_POS: D3.1.POS D10.1.POS R8.1.1 | length 141
  Layer 1 w15: R8.1.1 ccw(c568.78,1106.22) R8.1.1@575,1106.22 ; D3.1.POS D10.1.POS
  Layer 1 w25: R8.1.1 571.89,1096.89 571.89,1034.45 D3.1.POS
NetD3.2_POS: D3.2.POS D10.2.POS R8.2.1 | length 141
  Layer 1 w15: R8.2.1 ccw(c1518.78,1106.22) R8.2.1@1525,1106.22 ; D3.2.POS D10.2.POS
  Layer 1 w25: R8.2.1 1521.89,1096.89 1521.89,1034.45 D3.2.POS
NetD4.1_POS: D4.1.POS D11.1.POS R4.1.1 | length 132.2
  Layer 1 w15: D4.1.POS D11.1.POS ; R4.1.1@1135,1093.78 cw(c1141.22,1093.78) R4.1.1
  Layer 1 w25: D11.1.POS R4.1.1@1135,1093.78
NetD4.2_POS: D4.2.POS D11.2.POS R4.2.1 | length 132.2
  Layer 1 w15: D4.2.POS D11.2.POS ; R4.2.1@2085,1098.78 cw(c2091.22,1098.78) R4.2.1
  Layer 1 w25: D11.2.POS R4.2.1@2085,1098.78
NetD5.1_POS: D5.1.POS D13.1.POS R5.1.1 | length 132.2
  Layer 1 w15: D5.1.POS D13.1.POS ; R5.1.1@1135,773.78 cw(c1141.22,773.78) R5.1.1
  Layer 1 w25: D13.1.POS R5.1.1@1135,773.78
NetD5.2_POS: D5.2.POS D13.2.POS R5.2.1 | length 132.2
  Layer 1 w15: D5.2.POS D13.2.POS ; R5.2.1@2085,773.78 cw(c2091.22,773.78) R5.2.1
  Layer 1 w25: D13.2.POS R5.2.1@2085,773.78
NetD6.1_POS: D6.1.POS D14.1.POS R9.1.1 | length 141
  Layer 1 w15: R9.1.1 ccw(c568.78,786.22) R9.1.1@575,786.22 ; D6.1.POS D14.1.POS
  Layer 1 w25: R9.1.1 571.89,776.89 571.89,714.45 D6.1.POS
NetD6.2_POS: D6.2.POS D14.2.POS R9.2.1 | length 141
  Layer 1 w15: R9.2.1 ccw(c1518.78,786.22) R9.2.1@1525,786.22 ; D6.2.POS D14.2.POS
  Layer 1 w25: R9.2.1 1521.89,776.89 1521.89,714.45 D6.2.POS
NetD7.1_POS: D7.1.POS D12.1.POS R7.1.1 | length 132.2
  Layer 1 w15: D7.1.POS D12.1.POS ; R7.1.1@885,773.78 cw(c891.22,773.78) R7.1.1
  Layer 1 w25: D12.1.POS R7.1.1@885,773.78
NetD7.2_POS: D7.2.POS D12.2.POS R7.2.1 | length 132.2
  Layer 1 w15: D7.2.POS D12.2.POS ; R7.2.1@1835,773.78 cw(c1841.22,773.78) R7.2.1
  Layer 1 w25: D12.2.POS R7.2.1@1835,773.78
NetD8.1_POS: D8.1.POS D16.1.POS R6.1.1 | length 132.2
  Layer 1 w15: D8.1.POS D16.1.POS ; R6.1.1@1135,453.78 cw(c1141.22,453.78) R6.1.1
  Layer 1 w25: D16.1.POS R6.1.1@1135,453.78
NetD8.2_POS: D8.2.POS D16.2.POS R6.2.1 | length 132.2
  Layer 1 w15: D8.2.POS D16.2.POS ; R6.2.1@2085,453.78 cw(c2091.22,453.78) R6.2.1
  Layer 1 w25: D16.2.POS R6.2.1@2085,453.78
NetD9.1_POS: D9.1.POS D15.1.POS R10.1.1 | length 141
  Layer 1 w15: R10.1.1 ccw(c568.78,466.22) R10.1.1@575,466.22 ; D9.1.POS D15.1.POS
  Layer 1 w25: R10.1.1 571.89,456.89 571.89,394.45 D9.1.POS
NetD9.2_POS: D9.2.POS D15.2.POS R10.2.1 | length 141
  Layer 1 w15: R10.2.1 ccw(c1518.78,466.22) R10.2.1@1525,466.22 ; D9.2.POS D15.2.POS
  Layer 1 w25: R10.2.1 1521.89,456.89 1521.89,394.45 D9.2.POS
NetR3_2: R3.2 U5.6 | length 76.9
  Layer 4 w25: R3.2 1911.81,774.41 1987.01,774.41 U5.6
NRST: C9.2 U1.4 | length 391.8
  Layer 1 w15: v1(1150,905.54) 1195.54,905.54 1240,950 1240,1110 v1(1250,1120)
  Layer 4 w15: v1(1150,905.54) 1151.91,907.45 1158.57,907.45 1162.16,911.04 1211.04,911.04 U1.4 ; v1(1250,1120) 1250.46,1119.54 1294.23,1119.54 C9.2
SCL: R12.1 U1.3 U2.22 | length 564.5
  Layer 4 w15: R12.1 1060.11,766.11 1110,766.11 1110,601.65 1139.5,572.15 1139.5,539.39 1163.89,515 U2.22 ; 1110,771.11 1110,840 1148.54,878.54 1161.18,878.54 1168.1,885.45 1211.04,885.45 U1.3
SDA: R11.1 U1.2 U2.23 | length 569.4
  Layer 2 w15: v1(1023.56,840) 1150,840 v1(1161.54,851.54)
  Layer 4 w15: U2.23 1170,540 1161.5,548.5 1161.5,581.26 1140,602.76 1140,830 v1(1161.54,851.54) 1164.25,851.54 1169.25,856.54 1170.3,856.54 1173.62,859.86 1211.04,859.86 U1.2
SWCLK: U1.20 | length 877.4
  Layer 2 w15: v2(890,900) 980,990 1280,990 1310,960 1310,860 1342,828 v1(1520,828)
  Layer 4 w15: U1.20 1491.59,834.84 1493.44,833 1515,833 v1(1520,828)
SWDIO: U1.19 | length 859.8
  Layer 2 w15: v2(890,1000) 907.59,1000 937.59,1030 1320,1030 1350,1000 1350,888.79 1358.79,880 1360,880 1380,860 v1(1520,860)
  Layer 4 w15: U1.19 1438.6,860.22 1519.78,860.22 v1(1520,860)
touchIn: U1.18 U4.1 | length 438.9
  Layer 4 w15: U4.1 1517.4,737.4 1580,800 1580,860 1553,887 1496.59,887 1495.62,886.02 U1.18
touchPad: C8.2 U4.3 | length 90.8
  Layer 4 w25: v1(1375,625) 1401.07,651.07 1401.07,651.3 1412.37,640 1449.68,640 C8.2
Vbatt: S1.3 U3.1 U3.3 | length 220.5
  Layer 4 w15: U3.1@562.6,838.58 562.6,862.6 580,880 620,880 637.4,862.6 U3.3
  Layer 4 w30: S1.3 537.91,854.53 cw(c537.91,838.58) U3.1@553.86,838.58
pads on no net: J1.2 J1.3 J1.4 J1.S1 J1.S2 J1.S4 J1.S5 S1. S1.1 S1.S1 S1.S2 S1.S3 S1.S4 U1.6 U1.7 U1.8 U1.9 U1.10 U1.11 U1.12 U1.13 U1.14 U1.17 U2.1 U2.11 U2.20 U3.4

## Polygon pours and split planes (outlines as drawn)
touchPad on Layer 1 "touch_pad" (solid, remove dead copper, pour order 1): 1475,500 cw(c1450,500) 1450,475 1200,475 cw(c1200,500) 1175,500 1175,850 cw(c1200,850) 1200,875 1450,875 cw(c1450,850) 1475,850 1475,800 1475,550
GND on Layer 3 "PGND_3" (solid, remove dead copper, pour order 0): 450,225 cw(c450,300) 375,300 375,1050 cw(c450,1050) 450,1125 2200,1125 cw(c2200,1050) 2275,1050 2275,300 cw(c2200,300) 2200,225

## Silkscreen, mask and mechanical layers (free items; w line width, h text height)
Top Overlay:
  circle w25: c1325,673.66 r150
  circle w25: c1325,673.66 r90
  circle w40: c1325,673.66 r20
  lines w25: 1200,498.66 ccw(c1321.63,669.85) 1449.03,502.91 ; 1200,848.66 cw(c1321.63,677.47) 1449.03,844.41
  text "G" at 710,980.67 h60
  text "D" at 940,980 h60
  text "C" at 940,880.67 h60
  text "V" at 710.06,880 h60

## Text inside footprints (layer, text, board x,y; h text height)
J1: Mechanical 13 "PCB END" at 2301.18,381.5 h19.68 r90